# Altium PCB MainBord.PcbDoc
Units mm, origin at the board's own origin, x right, y up, seen from the top; angles counter-clockwise.
Board outline 25 x 15 mm, 2 copper layers (Top, Bottom); 16 components, 14 nets, 71 pads, 0 vias.
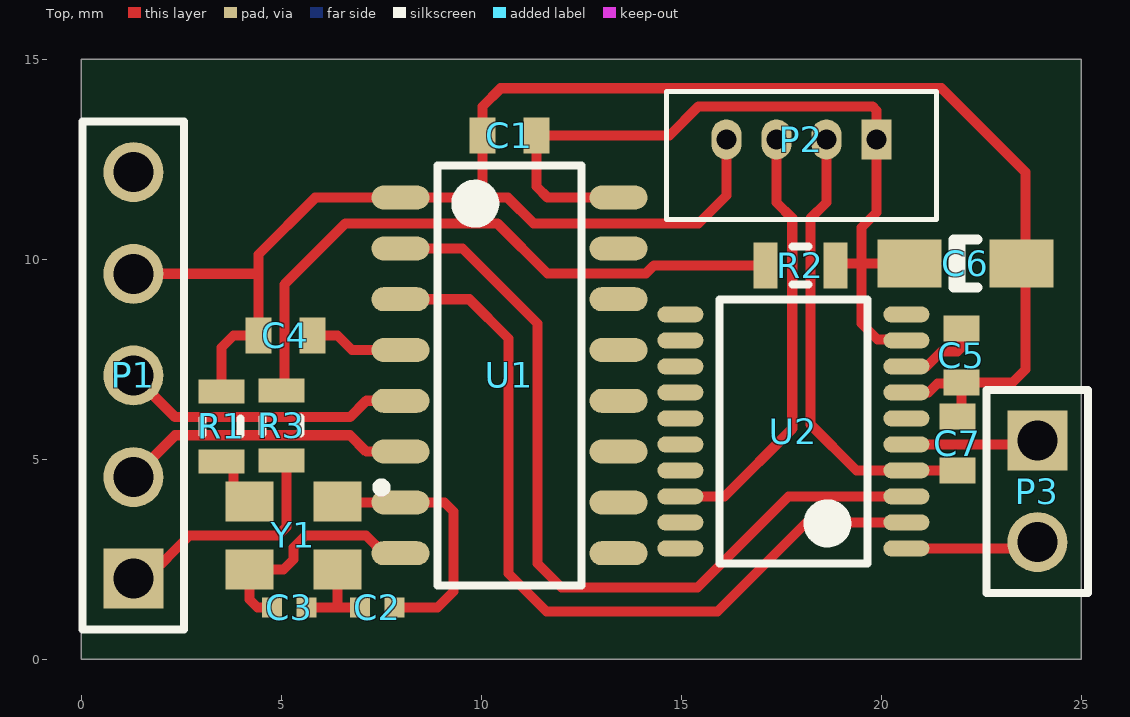
[diagram p0: Top view]
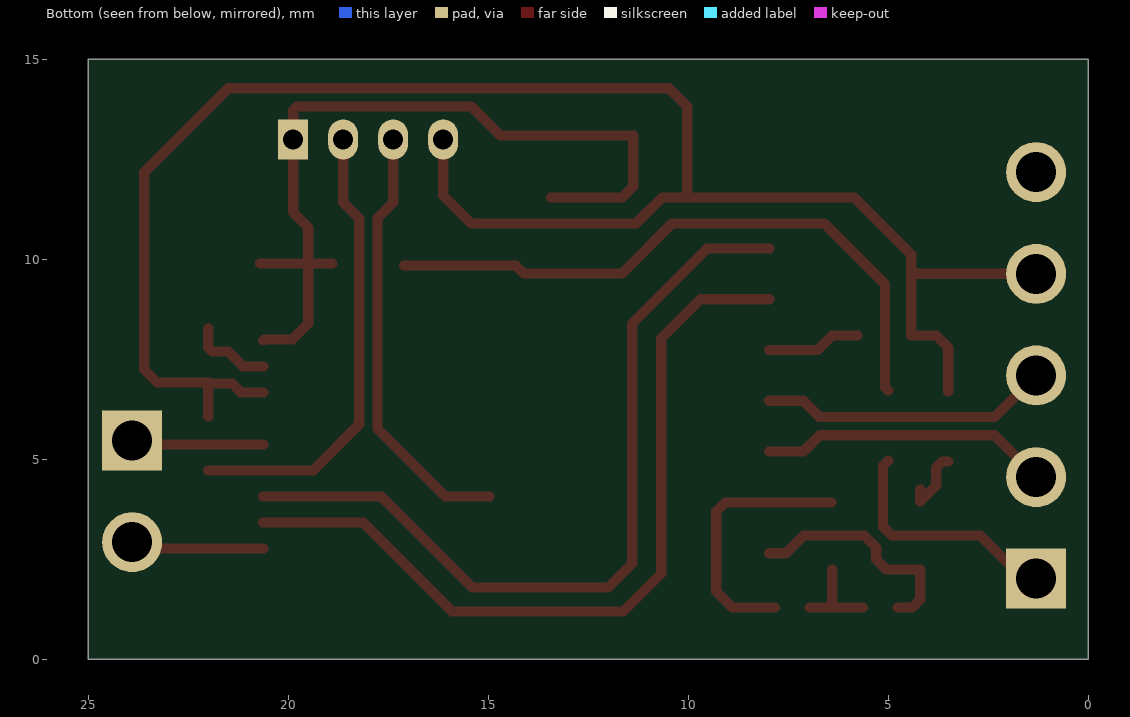
[diagram p1: Bottom view, seen from below]

## Layer stack, top to bottom
Top Solder: solder mask 0.0102, Solder Resist, Dk 3.5
Top: signal copper 0.0356
Dielectric 1: dielectric 0.32, FR-4, Dk 4.8
Bottom: signal copper 0.0356
Bottom Solder: solder mask 0.0102, Solder Resist, Dk 3.5

## Board outline
0,0 25,0 25,15 0,15

## Design rules (kind name [scope] priority, off if disabled: settings)
BoardOutlineClearance [All] p1: gap=5
Clearance [All] p1: gap=0.2
DiffPairsRouting [All] p1: maxlimit=0.2 minlimit=0.2 mostfreqgap=0.2 toplayer_minwidth=0.2 toplayer_maxwidth=0.3 toplayer_prefwidth=0.3 bottomlayer_minwidth=0.2 bottomlayer_maxwidth=0.3 bottomlayer_prefwidth=0.3 maxuncoupledlength=12.7
HoleSize [All] p1: absolutevalues=TRUE maxlimit=5 minlimit=0.2 maxpercent=80.000 minpercent=20.000
HoleToHoleClearance [All] p1: gap=0.2 allowstackedmicrovias=TRUE
MinimumSolderMaskSliver [All] p1: minsoldermaskwidth=0.2
PolygonConnect [All] p1: connectstyle=Relief reliefconductorwidth=0.254 reliefentries=4 polygonreliefangle="90 Angle" airgapwidth=0.254
RoutingCorners [All] p1: cornerstyle=45-Degree minsetback=2 maxsetback=2
RoutingVias [All] p1: holewidth=0.7 width=0.9 viastyle="Through Hole" minholewidth=0.3 minwidth=1.2 maxholewidth=0.4 maxwidth=3
SolderMaskExpansion [All] p1: expansion=0.1
Width [All] p1: maxlimit=1 minlimit=0.2 preferedwidth=0.3
25 further rules are at their usual default settings.

## Classes and differential pairs
differential pair USB: +USB_P -USB_N

## Components (designator, comment, footprint, x,y, rotation, side; value= is the part's Value field where it differs from the comment)
C1 "CeramicCapacitor" CAP0603 10.7,13.1 r0 top
C2 "CeramicCapacitor" CAP0402 7.4,1.3 r0 top
C3 "CeramicCapacitor" CAP0402 5.2,1.3 r180 top
C4 "CeramicCapacitor" CAP0603 5.1,8.1 r0 top
C5 "CeramicCapacitor" CAP0603 22,7.6 r90 top
C6 "TantalumCapacitor" CAP3216 22.1,9.9 r180 top
C7 "CeramicCapacitor" CAP0603 21.9,5.4 r270 top
P1 "Disp" THT_MALE_1x5 1.3,7.1 r90 top
P2 "Disp" 653004114822 18,13 r180 top
P3 "Disp" THT_MALE_1x2 23.9,4.2 r270 top
R1 "Resistor" RES0805_0_Ohm 3.5,5.825 r90 top
R2 "Resistor" RES0805_0_Ohm 17.975,9.85 r0 top
R3 "Resistor" RES0805_0_Ohm 5,5.85 r90 top
U1 "CH340G" SOIC16_CH340G 10.7,7.1 r0 top
U2 "STM8S003F3" TSOP65P640X120-20N 17.8,5.7 r180 top
Y1 "XTAL" SMD3225 5.3,3.1 r180 top

## Footprints (in the part's own frame and the unit in brackets; to place one, negate y for a bottom-side part, rotate by r counter-clockwise, add the part's x,y. Pads: shape width x height; smd on the part's side, far side on the other; paste and mask are expansions set on the pad)
653004114822 [mm] "Male Shrouded Header - 04p 1 row"
  rect 0.75x1 hole 0.5: 1(-1.875,0)
  oval 0.75x1 hole 0.5: 2(-0.625,0) 3(0.625,0) 4(1.875,0)
  silkscreen extent -3.37,-1.2 3.37,2, body extent -3.37,-1.2 3.38,2, height 4.21
CAP0402 [mm] "Chip Capacitor, 2-Leads, Body 1,00x0,50mm, IPC High Density"
  rect 0.5x0.5 smd: 1(-0.43,0) 2(0.43,0)
  body extent -0.5,-0.25 0.5,0.25, height 0.5
CAP0603 [mm] "Chip Capacitor, 2-Leads, Body 1,60x0,85mm, IPC High Density"
  rect 0.65x0.9 smd: 1(-0.675,0) 2(0.675,0)
  body extent -0.85,-0.48 0.85,0.48, height 0.9
CAP3216 [mm] "Surface mount tantalum capacitor"
  rect 1.6x1.2 smd: 1(-1.4,0) 2(1.4,0)
  silkscreen extent -0.3,-0.6 0.3,0.6, body extent -1.83,-0.81 1.83,0.81, height 1.61
RES0805_0_Ohm [mm] "Chip Resistor, 2-Leads, Body 2,00x1,20mm, IPC High Density"
  rect 0.6x1.15 smd: 1(-0.875,0) 2(0.875,0)
  silkscreen extent -0.2,-0.48 0.2,0.48, body extent -1,-0.6 1,0.6, height 0.4
SMD3225 [mm]
  rect 1.2x1 smd: 1(-1.1,-0.85) 2(1.1,-0.85) 3(1.1,0.85) 4(-1.1,0.85)
  silkscreen extent -2.3,-1.3 -2.1,-1.1, body extent -1.6,-1.25 1.6,1.25, height 0.77
SOIC16_CH340G [mm] "USB to UART Interface"
  oval 1.45x0.6 smd: 1(-2.725,4.445) 2(-2.725,3.175) 3(-2.725,1.905) 4(-2.725,0.635) 5(-2.725,-0.635) 6(-2.725,-1.905) 7(-2.725,-3.175) 8(-2.725,-4.445) 9(2.725,-4.445) 10(2.725,-3.175) 11(2.725,-1.905) 12(2.725,-0.635) 13(2.725,0.635) 14(2.725,1.905) 15(2.725,3.175) 16(2.725,4.445)
  silkscreen extent -1.8,-5.25 1.8,5.25, body extent -3,-5.25 3,5.25, height 1.8
THT_MALE_1x2 [mm]
  rect 1.5x1.5 hole 1: 1(-1.27,0)
  round 1.5 hole 1: 2(1.27,0)
  silkscreen extent -2.54,-1.27 2.54,1.27, body extent -2.54,-1.27 2.54,1.27, height 8.54
THT_MALE_1x5 [mm]
  rect 1.5x1.5 hole 1: 1(-5.08,0)
  round 1.5 hole 1: 2(-2.54,0) 3(0,0) 4(2.54,0) 5(5.08,0)
  silkscreen extent -6.35,-1.27 6.35,1.27, body extent -6.35,-1.27 6.35,1.27, height 8.54
TSOP65P640X120-20N [mm] "TSOP, 20-Leads, Body 6,50x4,40mm, Pitch 0,65mm, IPC High Density"
  oval 1.15x0.4 smd: 1(-2.825,2.925) 2(-2.825,2.275) 3(-2.825,1.625) 4(-2.825,0.975) 5(-2.825,0.325) 6(-2.825,-0.325) 7(-2.825,-0.975) 8(-2.825,-1.625) 9(-2.825,-2.275) 10(-2.825,-2.925) 11(2.825,-2.925) 12(2.825,-2.275) 13(2.825,-1.625) 14(2.825,-0.975) 15(2.825,-0.325) 16(2.825,0.325) 17(2.825,0.975) 18(2.825,1.625) 19(2.825,2.275) 20(2.825,2.925)
  silkscreen extent -1.85,-3.3 1.85,3.3, body extent -3.15,-3.3 3.15,3.3, height 1.2

## Part data
C1 C2 C3 C4 C5 C7: "Surface mount ceramic capacitor"
C6: "Surface mount tantalum capacitor"
P1: library part XH2.54_5PIN
P2: library part JST_XH_4PIN
P3: library part XH2.54_2PIN
R1 R2 R3: "Surface mount resistor"
U1: "USB to UART Interface"
U2: "Value line, 16 MHz STM8S 8-bit MCU, 8 Kbyte Flash, 128 byte data  EEPROM, 10-bit ADC, 3 timers, UART, SPI, I?C"
Y1: "Crystal Oscillator"

## Nets (pads, with @x,y where several pads share a name; then routed paths per layer and width w, separated by ;. In a path a pad name is that pad's centre, name@x,y a point inside that pad or via, vN(x,y) a via of type N, cw(c..) or ccw(c..) an arc to the next point about the centre after c; other vN are vias at no path point)
GND: C1.1 C2.1 C3.1 C4.1 C5.1 C6.1 C7.1 P1.4 P2.4 R1.1 R1.2 U1.1 U2.7 Y1.2 Y1.4 | length 51.1
  Top w0.254: P1.4 4.365,9.64 ; R1.1 3.65,4.95 3.8,4.8 3.8,4.35 Y1.2 Y1.2@4.2,4.25 ; R1.2 3.5,7.8 3.8,8.1 C4.1 4.425,10.125 5.845,11.545 U1.1 10.657,11.545 11.3,10.902 14.11,10.902 14.112,10.9 15.425,10.9 16.125,11.6 P2.4@16.125,12.8 ; C3.1 C2.1 ; 6.4,1.3 Y1.4 ; 10.025,11.57 C1.1 10.025,13.825 10.481,14.281 21.5,14.281 23.6,12.181 23.6,7.25 23.275,6.925 C5.1 ; U2.7 21.175,6.675 21.4,6.9 21.975,6.9 C5.1 ; C7.1@22,6.075 C5.1
MB_PWR: P3.2 U2.1 | length 3.6
  Top w0.254: U2.1 24.045,2.775 P3.2@24.2,2.93
MB_RST: P3.1 U2.5 | length 3.5
  Top w0.254: U2.5 U2.5 P3.1@24.107,5.377
NetC4_2: C4.2 U1.4 | length 2.4
  Top w0.254: C4.2 6.4,8.1 6.765,7.735 U1.4
NetC5_2: C5.2 U2.8 | length 2
  Top w0.254: U2.8 21.125,7.325 21.5,7.7 21.9,7.7 22,7.8 C5.2
RST: C7.2 P2.2 U2.4 | length 11.3
  Top w0.254: P2.2@18.625,12.8 18.625,11.425 18.223,11.023 18.223,5.877 19.375,4.725 U2.4 C7.2@22,4.725
RX: U1.2 U2.3 | length 20.6
  Top w0.254: U1.2 9.525,10.275 11.4,8.4 11.4,2.4 12,1.8 15.4,1.8 17.675,4.075 U2.3
SWIM: P2.3 U2.18 | length 10.7
  Top w0.254: U2.18 16.075,4.075 17.769,5.769 17.769,11.031 17.375,11.425 P2.3@17.375,12.8
TX: U1.3 U2.2 | length 20.2
  Top w0.254: U1.3 9.695,9.005 10.675,8.025 10.675,2.15 11.625,1.2 15.9,1.2 18.125,3.425 U2.2
USB_N: P1.2 U1.6 | length 7.3
  Top w0.254: P1.2 2.343,5.603 6.715,5.603 7.123,5.195 U1.6
USB_P: P1.3 U1.5 | length 7.3
  Top w0.254: P1.3 2.343,6.057 6.715,6.057 7.123,6.465 U1.5
VCC: C1.2 C6.2 P1.1 P2.1 R2.1 R2.2 R3.1 R3.2 U1.16 U2.9 | length 42.9
  Top w0.254: P1.1 1.62,2.02 2.7,3.1 4.912,3.1 5.127,3.315 5.127,4.848 R3.1 ; R3.2 5.077,6.802 5.077,9.377 6.602,10.902 10.398,10.902 11.652,9.648 14.11,9.648 14.312,9.85 R2.1 ; U1.16 11.655,11.545 11.375,11.825 C1.2 14.7,13.1 15.427,13.827 19.773,13.827 19.875,13.725 19.875,11.175 19.5,10.8 19.5,9.9 ; R2.2@18.9,9.9 19.5,9.9 ; U2.9 20.6,8 19.9,8 19.5,8.4 19.5,9.9 ; C6.2 19.5,9.9
XI: C2.2 U1.7 Y1.1 | length 6.6
  Top w0.254: Y1.1@6.425,3.925 U1.7 9.075,3.925 9.3,3.7 9.3,1.7 8.9,1.3 C2.2
XO: C3.2 U1.8 Y1.3 | length 5.9
  Top w0.254: C3.2 4.4,1.3 4.2,1.5 Y1.3 5.05,2.25 5.3,2.5 5.3,2.8 5.6,3.1 7.112,3.1 7.557,2.655 U1.8
pads on no net: P1.5 U1.9 U1.10 U1.11 U1.12 U1.13 U1.14 U1.15 U2.6 U2.10 U2.11 U2.12 U2.13 U2.14 U2.15 U2.16 U2.17 U2.19 U2.20

## Silkscreen, mask and mechanical layers (free items; w line width, h text height)
Board:
  lines w0.254: 0,1 0,0 1,0 ; 0,14 0,15 1,15 ; 24,0 25,0 25,1 ; 24,15 25,15 25,14